# Altium PCB CH32L&VxxCx_Touch_Kit.PcbDoc
Units mil, origin at the board's own origin, x right, y up, seen from the top; angles counter-clockwise.
Board outline 2598.43 x 2007.87 mil, 2 copper layers (Top Layer, Bottom Layer); 52 components, 64 nets, 220 pads, 263 vias.
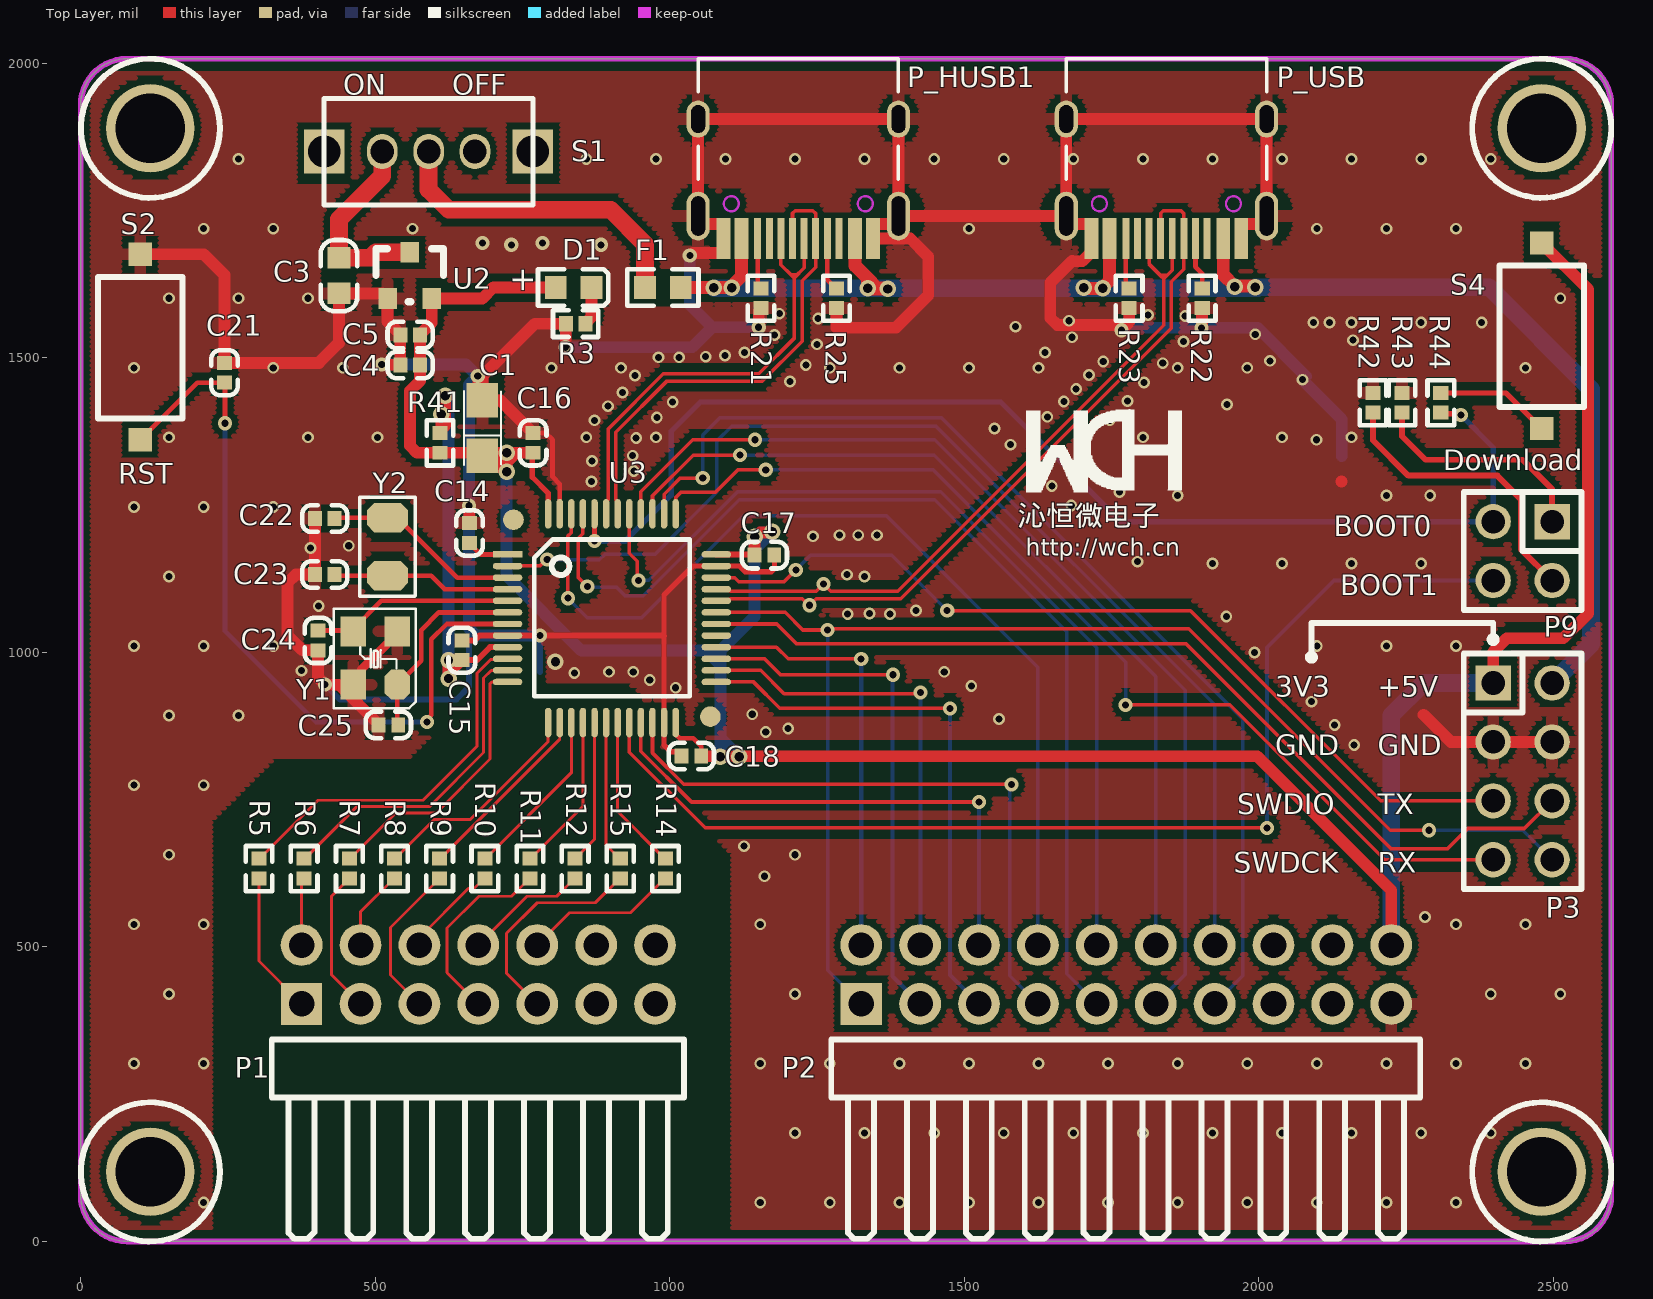
[diagram p0: Top Layer view]
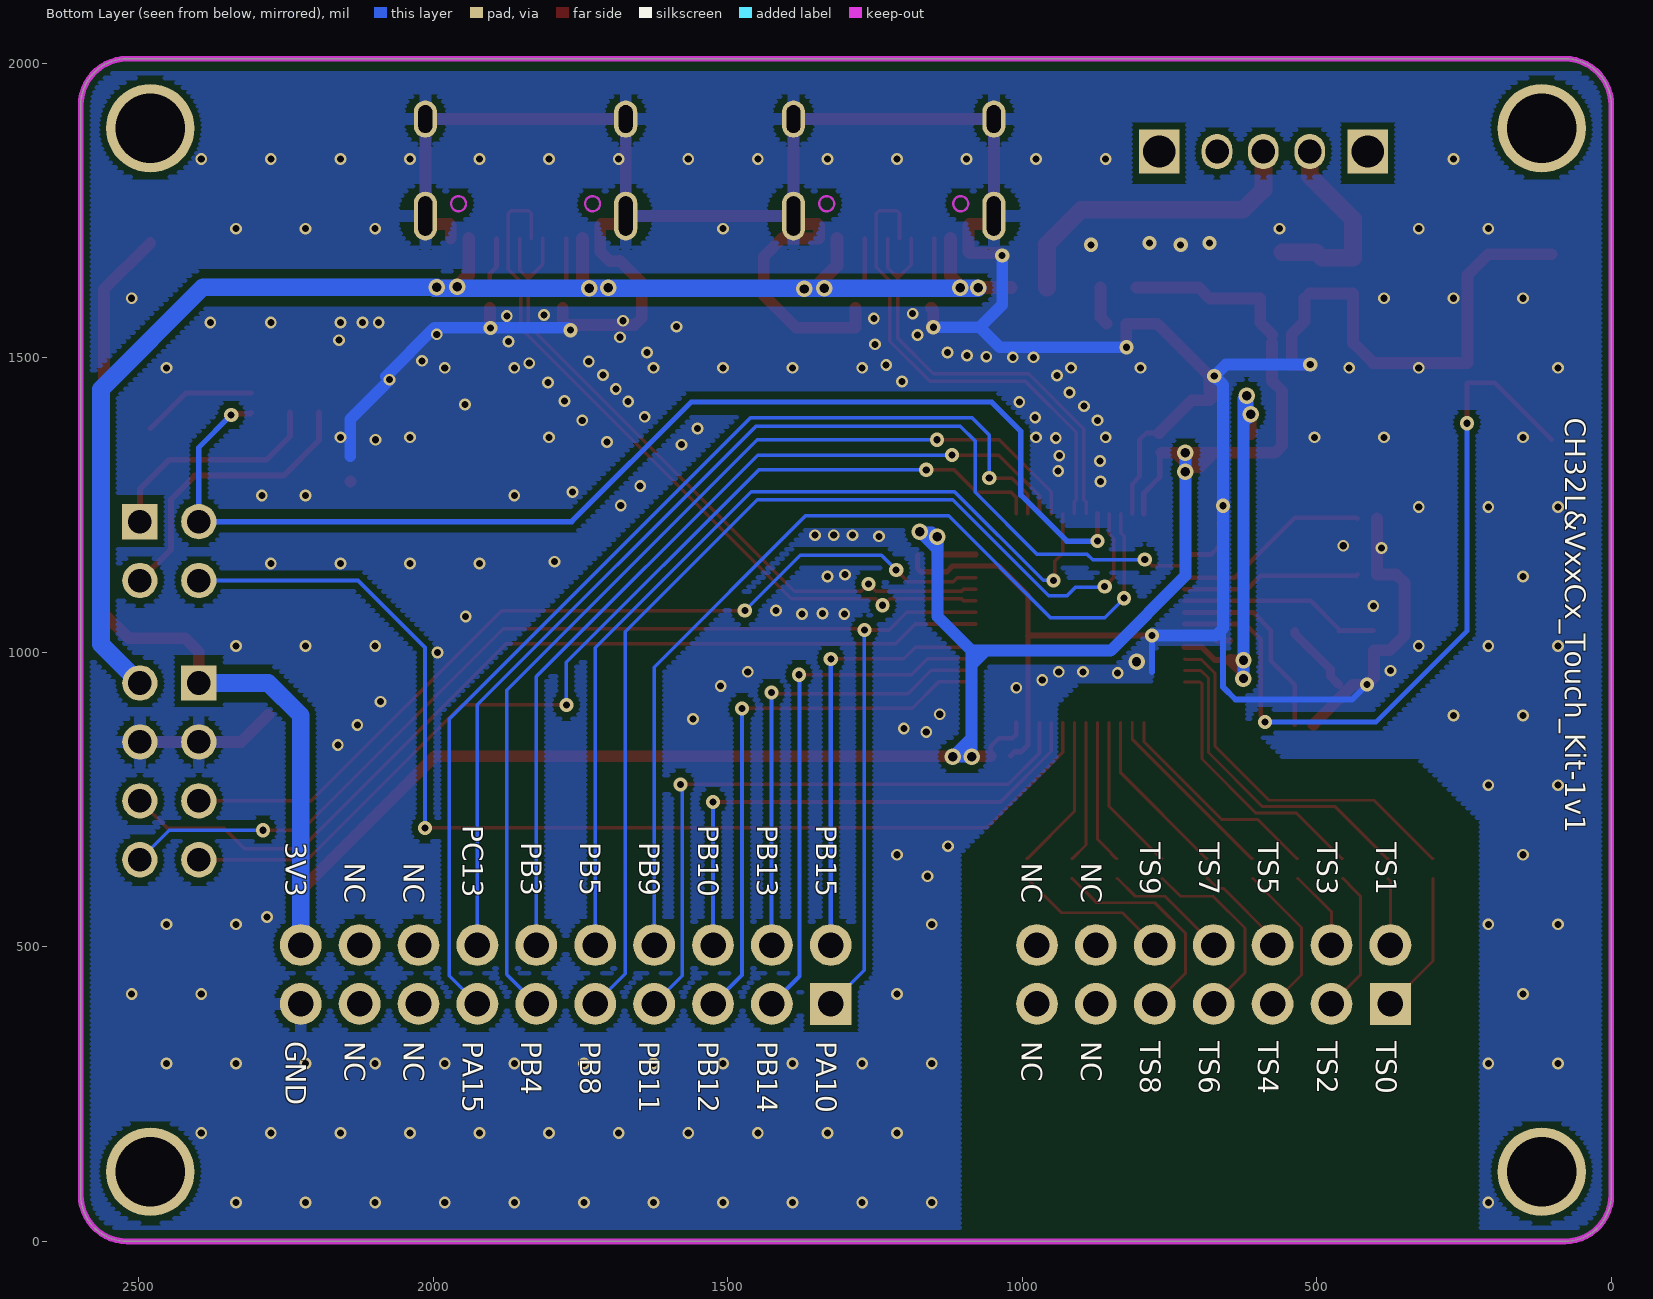
[diagram p1: Bottom Layer view, seen from below]

## Layer stack, top to bottom
Top Solder: solder mask 0.4, Solder Resist, Dk 3.5
Top Layer: signal copper 1.4
Dielectric 1: dielectric 12.6, FR-4, Dk 4.8
Bottom Layer: signal copper 1.4
Bottom Solder: solder mask 0.4, Solder Resist, Dk 3.5

## Board outline
0,78.74 ccw(c78.74,78.74) 78.74,0 2519.69,0 ccw(c2519.69,78.74) 2598.43,78.74 2598.43,1929.13 ccw(c2519.69,1929.13) 2519.69,2007.87 78.74,2007.87 ccw(c78.74,1929.13) 0,1929.13

## Design rules (kind name [scope] priority, off if disabled: settings)
Clearance Clearance_2 [InNetClass('Net Class1') vs InPolygon] p1: gap=39.37 ignorepadtopadclearanceinfootprint=FALSE
Clearance Clearance_1 [InPolygon] p2: gap=10 ignorepadtopadclearanceinfootprint=FALSE
Clearance [All] p3: gap=6 ignorepadtopadclearanceinfootprint=FALSE except(8: Arc-Via Track-Via SMDPad-Via THPad-Via Via-Via Via-Fill Via-Poly Via-Region Via-Hole)
ComponentClearance [All] p1 off: gap=10 collisioncheckmode=3 verticalgap=10 showdistances=FALSE
DiffPairsRouting [All] p1: maxlimit=10 minlimit=7 mostfreqgap=8 toplayer_minwidth=6 toplayer_maxwidth=15 toplayer_prefwidth=8 bottomlayer_minwidth=6 bottomlayer_maxwidth=15 bottomlayer_prefwidth=8 maxuncoupledlength=500
MinimumSolderMaskSliver [All] p1 off: minsoldermaskwidth=10
PolygonConnect PolygonConnect_1 [IsVia] p1: connectstyle=Direct reliefconductorwidth=10 reliefentries=4 polygonreliefangle="90 Angle" airgapwidth=10
PolygonConnect [All] p2: connectstyle=Relief reliefconductorwidth=20 reliefentries=4 polygonreliefangle="90 Angle" airgapwidth=10
RoutingVias [All] p1: holewidth=16 width=28 viastyle="Through Hole" minholewidth=12 minwidth=20 maxholewidth=28 maxwidth=50
SilkToSilkClearance [All] p1 off: silktosilkclearance=10
SilkToSolderMaskClearance [IsPad] p1 off: minsilkscreentomaskgap=10 clearancetoexposedcopper=TRUE
SolderMaskExpansion [All] p1: expansion=2 istentingtop=FALSE
Width [All] p1: maxlimit=100 minlimit=5 preferedwidth=10
25 further rules are at their usual default settings.

## Classes and differential pairs
net class "Net Class1": PA0 PA1 PA2 PA3 PA4 PA5 PA6 PA7 PB0 PB1 TS0 TS1 TS2 TS3 TS4 TS5 TS6 TS7 TS8 TS9
component class CH32VxxCx_Touch_Kit-1v1: C1 C3 C4 C5 C14 C15 C16 C17 C18 C21 C22 C23 C24 C25 D1 F1 P1 P2 P3 P9 P_HUSB1 P_USB R3 R5 R6 R7 R8 R9 R10 R11 R12 R14 R15 R21 R22 R23 R25 R41 R42 R43 R44 S1 S2 S4 U2 U3 Y1 Y2
differential pair PA11PA12: +PA12 -PA11
differential pair PB6PB7: +PB7 -PB6

## Components (designator, comment, footprint, x,y, rotation, side; value= is the part's Value field where it differs from the comment)
C1 "10uF" CASE-A_3216 682,1381 r90 top
C3 "10uF" 0603_C 438.36,1670.08 r270 top
C4 "2.2uF" 0402_C 576,1488 r270 top
C5 "0.1uF" 0402_C 576,1539 r270 top
C14 "0.1uF" 0402_C 660,1186 r180 top
C15 "0.1uF" 0402_C 647,987 r180 top
C16 "0.1uF" 0402_C 768,1372.46 r0 top
C17 "0.1uF" 0402_C 1177.46,1165 r270 top
C18 "0.1uF" 0402_C 1020,824 r90 top
C21 "0.1uF" 0402_C 244,1491.46 r0 top
C22 "12pF" 0402_C 431,1227.22 r270 top
C23 "12pF" 0402_C 431,1132.22 r270 top
C24 "22pF" 0402_C 403,1003.54 r180 top
C25 "22pF" 0402_C 505.54,877 r90 top
D1 "power" 0603+ 806.48,1619.59 r0 top
F1 "500mA" 0603 1018.63,1619.59 r180 top
P1 "Header 7X2" HDR-TH_14P-P2.54-H-M-R2-C10-S2.54 375,403.22 r0 top
P2 "Header 10X2" HDR-TH_20P-P2.54-H-M-R2-C10-S2.54 1775,453.22 r0 top
P3 "Header 4X2" IDC8-2.54mm 2398,948 r0 top
P9 "Header 2X2" IDC4-2.54mm 2498,1222 r270 top
P_HUSB1 "TYPE-C" TYPE-C-Receptacle-2.0 1218.24,1702.67 r180 top
P_USB "TYPE-C" TYPE-C-Receptacle-2.0 1843.24,1702.67 r180 top
R3 "1K" 0402 857,1558 r180 top
R5 "0Ω(560Ω)" 0402 302.64,649.76 r270 top
R6 "0Ω(560Ω)" 0402 379.3,616.3 r90 top
R7 "0Ω(560Ω)" 0402 455.97,649.76 r270 top
R8 "0Ω(560Ω)" 0402 532.64,616.3 r90 top
R9 "0Ω(560Ω)" 0402 609.3,649.76 r270 top
R10 "0Ω(560Ω)" 0402 685.97,616.3 r90 top
R11 "0Ω(560Ω)" 0402 762.64,649.76 r270 top
R12 "0Ω(560Ω)" 0402 839.3,616.3 r90 top
R14 "0Ω(560Ω)" 0402 992.64,616.3 r90 top
R15 "0Ω(560Ω)" 0402 915.97,649.76 r270 top
R21 "5.1K" 0402 1155,1618 r270 top
R22 "NC(5.1K)" 0402 1904,1618 r270 top
R23 "NC(5.1K)" 0402 1780,1618 r270 top
R25 "5.1K" 0402 1283,1618 r270 top
R41 "0Ω" 0402 610,1339 r90 top
R42 "10K" 0402 2193.86,1407 r90 top
R43 "10K" 0402 2243,1407 r90 top
R44 "1K" 0402 2309,1407 r90 top
S1 "SW SPDT" SW1 590.55,1850.39 r0 top
S2 "RST" SMD_6.1x3.65x2.5mm-KEY 101,1675.96 r270 top
S4 "Download" SMD_6.1x3.65x2.5mm-KEY 2480.32,1694.96 r270 top
U2 "6219P33M" SOT-23 558.36,1640.08 r0 top
U3 "CH32V203CxT" LQFP48 724.62,1166.32 r270 top
Y1 "8M" XT3225 537.36,945.22 r90 top
Y2 "32.768k" FC-135 521,1228.65 r270 top
? "Comment" HOLE 118.11,1889.76 r0 top
? "Comment" HOLE 2480.32,1889.76 r0 top
? "Comment" HOLE 2480.31,118.11 r0 top
? "Comment" HOLE 118.11,118.11 r0 top

## Footprints (in the part's own frame and the unit in brackets; to place one, negate y for a bottom-side part, rotate by r counter-clockwise, add the part's x,y. Pads: shape width x height; smd on the part's side, far side on the other; paste and mask are expansions set on the pad)
0402 [mm]
  rect 0.6x0.65 smd mask+0.051: 1(0,0) 2(0.85,0)
  silkscreen extent -0.55,-0.58 1.4,0.57
0402_C [mm]
  rect 0.65x0.6 smd mask+0.051: 1(0,0) 2(0,-0.85)
  silkscreen extent -0.58,-1.4 0.57,0.55
0603 [mm]
  rect 0.93x0.98 smd: 1(0,0) 2(1.54,0)
  silkscreen extent -0.76,-0.79 2.3,0.79
0603+ [mm]
  rect 0.93x0.98 smd: 1(0,0) 2(1.54,0)
  silkscreen extent -0.76,-0.79 2.27,0.79
0603_C [mm]
  rect 0.93x0.98 smd mask+0.051: 1(0,0) 2(1.54,0)
  silkscreen extent -0.76,-0.79 2.31,0.79
CASE-A_3216 [mil]
  rect 59.05x53.5 smd: 1(-47.24,0) 2(47.24,0)
  silkscreen extent -63,-32 63,32
FC-135 [mil]
  oct 50x70 smd: 1(0,0) 2(98.43,0)
  silkscreen extent -35,-47 133,47
HDR-TH_14P-P2.54-H-M-R2-C10-S2.54 [mm]
  rect 1.778x1.8 hole 1.1: 1(0,0)
  round 1.8 hole 1.1: 2(0,2.54) 3(2.54,0) 4(2.54,2.54) 5(5.08,0) 6(5.08,2.54) 7(7.62,0) 8(7.62,2.54) 9(10.16,0) 10(10.16,2.54) 11(12.7,0) 12(12.7,2.54) 13(15.24,0) 14(15.24,2.54)
  silkscreen extent -1.29,-10.13 16.49,-1.54
HDR-TH_20P-P2.54-H-M-R2-C10-S2.54 [mm]
  rect 1.778x1.8 hole 1.1: 1(-11.43,-1.27)
  round 1.8 hole 1.1: 2(-11.43,1.27) 3(-8.89,-1.27) 4(-8.89,1.27) 5(-6.35,-1.27) 6(-6.35,1.27) 7(-3.81,-1.27) 8(-3.81,1.27) 9(-1.27,-1.27) 10(-1.27,1.27) 11(1.27,-1.27) 12(1.27,1.27) 13(3.81,-1.27) 14(3.81,1.27) 15(6.35,-1.27) 16(6.35,1.27) 17(8.89,-1.27) 18(8.89,1.27) 19(11.43,-1.27) 20(11.43,1.27)
  silkscreen extent -12.72,-11.4 12.68,-2.81
HOLE [mm]
  round 3.81 hole 3: 0(0,0)
  silkscreen extent -3,-3 3,3
IDC4-2.54mm [mil]
  rect 60x60 hole 40: 1(0,0)
  round 60 hole 40: 2(100,0) 3(0,-100) 4(100,-100)
  silkscreen extent -50,-150 150,50
IDC8-2.54mm [mil]
  rect 60x60 hole 40: 1(0,0)
  round 60 hole 40: 2(100,0) 3(0,-100) 4(100,-100) 5(0,-200) 6(100,-200) 7(0,-300) 8(100,-300)
  silkscreen extent -50,-350 150,50
LQFP48 [mm]
  round 0.889 smd: 0(-1.496,0.254) 0(6.996,8.746)
  rect 0.28x1.27 smd mask+0.051: 1(0,0)
  oval 0.28x1.27 smd mask+0.051: 2(0.5,0) 3(1,0) 4(1.5,0) 5(2,0) 6(2.5,0) 7(3,0) 8(3.5,0) 9(4,0) 10(4.5,0) 11(5,0) 12(5.5,0) 25(5.5,9) 26(5,9) 27(4.5,9) 28(4,9) 29(3.5,9) 30(3,9) 31(2.5,9) 32(2,9) 33(1.5,9) 34(1,9) 35(0.5,9) 36(0,9)
  oval 1.27x0.28 smd mask+0.051: 13(7.25,1.75) 14(7.25,2.25) 15(7.25,2.75) 16(7.25,3.25) 17(7.25,3.75) 18(7.25,4.25) 19(7.25,4.75) 20(7.25,5.25) 21(7.25,5.75) 22(7.25,6.25) 23(7.25,6.75) 24(7.25,7.25) 37(-1.75,7.25) 38(-1.75,6.75) 39(-1.75,6.25) 40(-1.75,5.75) 41(-1.75,5.25) 42(-1.75,4.75) 43(-1.75,4.25) 44(-1.75,3.75) 45(-1.75,3.25) 46(-1.75,2.75) 47(-1.75,2.25) 48(-1.75,1.75)
  silkscreen extent -0.65,1.15 6.11,7.86
SMD_6.1x3.65x2.5mm-KEY [mm]
  rect 1x1 smd: 1(0,0) 2(8,0)
  silkscreen extent 0.98,-1.83 7.08,1.83
SOT-23 [mm]
  rect 0.8x0.9 smd: 1(-0.95,-1) 2(0.95,-1) 3(0,1)
  silkscreen extent -1.46,-1.14 1.46,1.15
SW1 [mm]
  rect 1.75x1.9 hole 1.4: 0(-4.5,0) 0(4.5,0)
  oval 1.321x1.524 hole 1.016: 1(0,0) 2(-2,0) 3(2,0)
  silkscreen extent -4.51,-2.31 4.5,2.29
TYPE-C-Receptacle-2.0 [mm]
  oval 1x2.1 hole 0.6 slot 1.7 at 90 deg: 0(-4.32,-0.97) 0(4.32,-0.97)
  oval 1x1.6 hole 0.6 slot 1.2 at 90 deg: 0(-4.32,-5.15) 0(4.32,-5.15)
  rect 0.6x1.75 smd mask+0.051: A1(-3.225,0) A4(-2.45,0) B1(3.225,0) B4(2.45,0)
  rect 0.3x1.75 smd mask+0.051: A5(-1.25,0) A6(-0.25,0) A7(0.25,0) A8(1.25,0) B5(1.75,0) B6(0.75,0) B7(-0.75,0) B8(-1.75,0)
  Keep-Out Layer circle w0.1: c2.89,-1.5 r0.325
  Keep-Out Layer circle w0.1: c-2.89,-1.5 r0.325
  silkscreen extent -4.32,-7.75 4.32,-2.55
XT3225 [mm]
  oct 1.3x1.1 smd: 1(0,0)
  rect 1.3x1.1 smd: 2(2.3,0) 3(2.3,1.9) 4(0,1.9)
  silkscreen extent -1.02,-0.8 3.27,2.74

## Part data
C1: library part T-A/4.7uF/16V
C3 C4 C5 C21: library part CAP, "Capacitor"
C14 C15 C16 C17 C18 C22 C23 C24 C25: library part Cap, "Capacitor", LatestRevisionDate=17-Jul-2002, LatestRevisionNote="Re-released for DXP Platform.", PackageReference=RAD-0.3, Published=8-Jun-2000, Publisher="Altium Limited"
D1: library part LED0, "Typical INFRARED GaAs LED", LatestRevisionDate=08-Jul-2005, LatestRevisionNote="Mech Layer 1 removed.", PackageDescription="LED; 2 Leads", PackageReference=LED-0, Published=8-Jun-2000, Publisher="Altium Limited"
F1: library part FUSE1, "Fuse"
P1: "Header, 7-Pin, Dual row", LatestRevisionDate=17-Jul-2002, LatestRevisionNote="Re-released for DXP Platform.", Publisher="Altium Limited"
P2: "Header, 10-Pin, Dual row", LatestRevisionDate=17-Jul-2002, LatestRevisionNote="Re-released for DXP Platform.", Publisher="Altium Limited"
P3: "Header, 4-Pin, Dual row", LatestRevisionDate=17-Jul-2002, LatestRevisionNote="Re-released for DXP Platform.", Publisher="Altium Limited"
P9: "Header, 2-Pin, Dual row", LatestRevisionDate=17-Jul-2002, LatestRevisionNote="Re-released for DXP Platform.", Publisher="Altium Limited"
P_HUSB1 P_USB: library part TYPE-C1
R3 R5 R6 R7 R8 R9 R10 R11 R12 R14 R15: library part RES
R21 R22 R23 R25 R41 R42 R43 R44: library part Res2, "Resistor"
  R41 R42 R43 R44: LatestRevisionDate=17-Jul-2002, LatestRevisionNote="Re-released for DXP Platform.", PackageReference=AXIAL-0.4, Published=8-Jun-2000, Publisher="Altium Limited"
S2: library part SW-PB, "Switch", LatestRevisionDate=17-Jul-2002, LatestRevisionNote="Re-released for DXP Platform.", PackageDescription="Switch; 2 Leads", PackageReference=SPST-2, Published=24-Mar-1999, Publisher="Altium Limited"
S4: library part KEY1
U3: "RISC-V LMD-MCU, 144MHz, 2*USB FS, CAN"
Y1 Y2: library part XTAL, "Crystal Oscillator", LatestRevisionDate=17-Jul-2002, LatestRevisionNote="Re-released for DXP Platform.", PackageReference=R38, Published=8-Jun-2000, Publisher="Altium Limited"

## Via types
v1: diameter 20, hole 12, Top Layer to Bottom Layer, tented both sides, 204 vias
v2: diameter 24, hole 12, Top Layer to Bottom Layer, tented both sides, 40 vias
v3: diameter 28, hole 16, Top Layer to Bottom Layer, tented both sides, 19 vias

## Nets (pads, with @x,y where several pads share a name; then routed paths per layer and width w, separated by ;. In a path a pad name is that pad's centre, name@x,y a point inside that pad or via, vN(x,y) a via of type N, cw(c..) or ccw(c..) an arc to the next point about the centre after c; other vN are vias at no path point)
3V3: C1.1 C4.1 C5.1 C16.2 C17.2 C18.2 D1.1 P2.20 P3.1 R41.1 S4.1 U2.2 U3.24 U3.36 U3.48 | length 5212
  Top Layer w8: U3.24 1010.06,860.58 1016.64,854 1040,854 1053.46,840.54 C18.2 ; C17.2@1142.68,1166.32 C17.2
  Top Layer w9: C16.2@764.02,1339 766.69,1339 766.69,1297.31 793.52,1270.48 U3.48
  Top Layer w10: U3.36 C17.2@1142.68,1166.32
  Top Layer w20: 576,1526 C4.1 576,1461 559,1444 559,1350.72 570.72,1339 R41.1 v3(723.01,1339) ; C5.1 576,1539.98 595.76,1559.75 U2.2 681.71,1600.71 700.59,1619.59 D1.1 ; C1.1 682,1330.98 C1.1@689.98,1323 ; C16.2@764.02,1339 739.01,1339 ; C18.2 1053.96,823.5 1086,823.5 1118,823.5 1997.5,823.5 2225,596 P2.20 ; C17.2 v3(1144,1196) 1146.16,1196 1153.63,1203.47 1172.47,1203.47 v3(1174,1205) ; P3.1 2398,1001 2421,1024 2517,1024 2559,1066 2559,1616.28 S4.1 ; C1.1@689.98,1323 723.01,1323 ; C1.1@689.98,1323 698.75,1314.23 713.61,1314.23 720.84,1307 v3(723.01,1307) 723.01,1323 ; 723.01,1323 739.01,1339 ; 723.01,1323 v3(723.01,1339) ; v3(723.01,1339) 739.01,1339
  Bottom Layer w20: v3(723.01,1339) v3(723.01,1307) 723.01,1129.99 850,1003 1062,1003 ; v3(1174,1205) v3@1172.47,1203.47 ; 1062,1003 1086,1003 ; 1062,1003 1086,979 ; 1086,855 v3(1118,823) v3(1086,823) 1086,855 ; 1086,855 1086,979 ; 1086,979 1086,1003 ; 1086,1003 1144,1061 1144,1175 ; 1144,1175 v3@1172.47,1203.47 ; 1144,1175 v3(1144,1196) 1146.16,1196 1153.63,1203.47 v3@1172.47,1203.47
  Bottom Layer w30: P2.20 2225,893 2280,948 P3.1
+5V: F1.1 P3.2 P_HUSB1.A4 P_HUSB1.B4 P_USB.A4 P_USB.B4 | length 2672.2
  Top Layer w22: F1.1 v3@1102.1,1619.59 ; v3@1102.59,1619.59 1121.78,1638.78 P_HUSB1.B4 ; P_HUSB1.A4 1314.69,1656.31 1336,1635 ; v3@1336,1617 v3(1370,1617) ; v3(1336,1618) 1336,1635 ; v3@1366,1619 1352,1619 1336,1635 ; v3@1701,1618 v3(1735,1618) 1735,1619.62 1746.78,1631.4 P_USB.B4 ; P_USB.A4 1939.69,1640.95 v3@1958.65,1622 ; v3(1959,1621) 1959,1621.65 v3@1958.65,1622 ; v3@1989,1622 v3@1958.65,1622
  Bottom Layer w30: v3@1076,1618 v3(1336,1618) v3(1735,1618) 1959,1618 v3@1998,1618 ; v3(1994,1620) 2391,1620 2564,1447 2564,1014 P3.2
  other v3: 1075,1619 1105.1,1619 1702.66,1618.82
BOOT0: P9.3 R44.1 U3.44 | length 2057.4
  Top Layer w9: v2(871.93,1188.87) 872.09,1189.04 872.09,1235.06 U3.44 ; R44.1 2311,1405 2341,1405 v2(2343,1403)
  Bottom Layer w9: v2(871.93,1188.87) 924.33,1188.87 1002.36,1266.89 1002.36,1375.36 1052,1425 1562,1425 1765,1222 P9.3 2398,1348 v2(2343,1403)
BOOT1: P9.4 U3.20 | length 1923.4
  Top Layer w6: U3.20 931.32,830.68 1060,702 v2(2014,702)
  Bottom Layer w7: v2(2014,702) 2014,1008 2128,1122 P9.4
GND: C1.2 C3.2 C4.2 C5.2 C14.2 C15.2 C16.1 C17.1 C18.1 C21.1 C22.2 C23.2 C24.1 C25.1 P2.19 P3.3 P3.4 P_HUSB1.0 P_HUSB1.A1 P_HUSB1.B1 P_USB.0 P_USB.A1 P_USB.B1 R3.2 R21.2 R22.2 R23.2 R25.2 R42.2 R43.2 S2.1 U2.1 U3.8 U3.23 U3.35 U3.47 Y1.2 Y1.4 | length 8093.5
  Top Layer w8: C16.1 789.54,1372.46 801,1361 801,1298 813.21,1285.79 U3.47
  Top Layer w9: C18.1 1012.89,831.11 1001.89,831.11 990.37,842.63 U3.23 990.37,1028 990.37,1097.37 1039.64,1146.64 U3.35 1118.36,1146.64 1128,1137 1172.59,1137 1177.96,1142.36 1177.96,1164.51 C17.1
  Top Layer w10: C15.2 669.15,1020.46 677.21,1028.53 U3.8 v2(780,1028.53) 989.84,1028.53 990.37,1028
  Top Layer w15: Y1.4 476.71,959.37 476.71,971.19 537.36,1031.83 Y1.2
  Top Layer w20: S2.1 208.96,1675.96 244,1640.92 C21.1 404.46,1491.46 438.36,1525.36 C3.2 U2.1@512.22,1609.45 ; C22.2 C23.2 365.22,1132.22 351,1118 351,1029 376.46,1003.54 C24.1 403,956.94 v2(414.72,945.22) 438.64,945.22 438.64,944.88 505.54,877.98 C25.1 ; v2(511,1489) 511.5,1488.5 542.04,1488.5 C4.2 C5.2 542.54,1539.98 520.96,1561.56 U2.1 ; v2(659,1249) 659.5,1248.5 659.5,1219.96 C14.2 ; v2(674,1469) 674.77,1468.23 C1.2@674.77,1435.47 ; C16.1 767.02,1372.46 765.2,1374.28 765.2,1375.26 712.22,1428.24 C1.2 C1.2@674.77,1435.47 ; v2(823,1518) 823.27,1518.27 823.27,1557.73 R3.2 771,1558 682,1469 682,1442.71 C1.2@674.77,1435.47 ; v2(1034,1674) 1035.08,1674 1039.3,1678.22 1089.46,1678.22 1091.27,1680.03 P_HUSB1.B1 1091.27,1725.31 1089.46,1727.12 1057.11,1727.12 1048.16,1736.07 1048.16,1740.86 1048.16,1905.43 1388.32,1905.43 P_HUSB1.0@1388.32,1740.86 ; v2(1151,1552) 1151,1580.54 1152.2,1581.74 1152.2,1582.72 1154.02,1584.54 R21.2 ; R25.2 1283,1551 1384,1551 1439,1606 1439,1672 1408.33,1702.67 P_HUSB1.A1 1345.2,1725.31 1347.02,1727.12 1379.37,1727.12 1388.32,1736.07 P_HUSB1.0@1388.32,1740.86 ; R23.2 1780,1560.56 1775.44,1556 1657.72,1556 1646,1567.72 1646,1627.43 1683.28,1664.72 1683.83,1664.17 1700.4,1664.17 1716.27,1680.03 P_USB.B1 1716.27,1725.31 1714.46,1727.12 1682.11,1727.12 1673.16,1736.07 P_USB.0@1673.16,1740.86 ; v2(1903,1551) 1903.5,1551.5 1903.5,1584.04 R22.2 ; P_USB.A1 1970.2,1725.31 1972.02,1727.12 2004.37,1727.12 2013.32,1736.07 2013.32,1740.86 2013.32,1905.43 1673.16,1905.43 P_USB.0@1673.16,1740.86 ; 2140.35,1290 2140.67,1290.33 ; 2279.76,894.24 2326,848 P3.3 P3.4 ; P_HUSB1.0@1388.32,1740.86 P_USB.0@1673.16,1740.86
  Bottom Layer w10: v2(414.72,945.22) 439.94,920 638,920 659,941 659,1041 ; 780,967 v2(780,1028.53)
  Bottom Layer w20: v2(511,1489) 654,1489 v2(674,1469) 659,1454 v2(659,1249) 659,1041 671.47,1028.53 v2(780,1028.53) ; v2(823,1518) 1038,1518 1072,1552 ; v2(1034,1674) 1034,1590 1072,1552 ; v2(1151,1552) 1072,1552 ; v2(1767,1547) 1771,1551 v2(1903,1551) 1998,1551 v1@2080,1469 ; v1(2074,1463) 2141,1396 2141,1333
  other v1: 208.74,65.87 1153.62,65.87 1271.73,65.87 1389.84,65.87 1507.95,65.87 1626.06,65.87 1744.17,65.87 1862.28,65.87 1980.39,65.87 2098.5,65.87 2216.61,65.87 2334.72,65.87 1212.68,183.98 1330.79,183.98 1448.9,183.98 1567.01,183.98 1685.12,183.98 1803.23,183.98 1921.34,183.98 2039.45,183.98 2157.56,183.98 2275.67,183.98 2393.78,183.98 90.63,302.09 208.74,302.09 1153.62,302.09 1271.73,302.09 1389.84,302.09 1507.95,302.09 1626.06,302.09 1744.17,302.09 1862.28,302.09 1980.39,302.09 2098.5,302.09 2216.61,302.09 2334.72,302.09 2452.83,302.09 149.68,420.2 1212.68,420.2 2393.78,420.2 2511.89,420.2 90.63,538.31 208.74,538.31 1153.62,538.31 2334.72,538.31 2452.83,538.31 2282,551 1161,620 149.68,656.42 1212.68,656.42 1126,671 90.63,774.53 208.74,774.53 2162,843 1163,865 1201,871 2128.85,876.85 1559,887 149.68,892.64 267.79,892.64 1140,895 2089.35,916.35 1010,940 1512,943 966,953 838,965 897,967 938,967 1466,967 375,969 1992.5,999.85 90.63,1010.75 208.74,1010.75 326.85,1010.75 2098.5,1010.75 2216.61,1010.75 2334.72,1010.75 1944.85,1060.85 1302,1065 1374,1065 1339,1066 1418,1071 404,1079 149.68,1128.86 1330.79,1128.86 1301,1132 1921.34,1151 2039.45,1151 2157.56,1151 2275.67,1151 1794,1154 390,1177 455,1181 1243,1197 1288,1199 1320,1199 1352,1199 90.63,1246.97 208.74,1246.97 326.85,1246.97 1681.59,1249.59 1862.28,1266.5 2216.61,1266.5 2291,1266.5 1763.67,1272.15 1648.59,1282.59 867,1290 939,1308 868,1325 937,1334 1578.59,1352.59 1705,1357 2098,1361 943,1364 149.68,1365.08 385.9,1365.08 504.01,1365.08 858.34,1365.08 976.45,1365.08 1803.23,1365.08 2039.45,1365.08 2157.56,1365.08 1551.09,1380.09 872,1394 1747,1394 978,1399 1641,1400 895,1418 1946,1421 1005,1425 1669,1426 1777,1427 920,1441 1690,1447 1805,1458 1204,1460 941,1470 1712,1471 90.63,1483.19 326.85,1483.19 444.96,1483.19 799.29,1483.19 917.4,1483.19 1271.73,1483.19 1389.84,1483.19 1507.95,1483.19 1626.06,1483.19 1862.28,1483.19 1980.39,1483.19 2452.83,1483.19 1231,1488 1837,1491 1736,1494 2019,1495 981,1501 1016,1501 1061,1502 1094,1504 1127,1509 1637,1509 1250,1523 1872,1528 2160,1530 1683,1535 1178,1539 1994,1540 1587,1553 2092.56,1560 2120,1560 2157.56,1560 2275.67,1560 2378.41,1560 1678,1563 1252,1567 1875,1571 1812,1573 1186,1575 149.68,1601.3 267.79,1601.3 385.9,1601.3 2511.89,1601.3 208.74,1719.41 326.85,1719.41 563.07,1719.41 1507.95,1719.41 2098.5,1719.41 2216.61,1719.41 2334.72,1719.41 267.79,1837.52 858.34,1837.52 976.45,1837.52 1094.57,1837.52 1212.68,1837.52 1330.79,1837.52 1448.9,1837.52 1567.01,1837.52 1685.12,1837.52 1803.23,1837.52 1921.34,1837.52 2039.45,1837.52 2157.56,1837.52 2275.67,1837.52 2393.78,1837.52
  other v2: 731,1692 883,1692 682,1695 784,1695
  other v3: 806,984
NetD1_2: D1.2 R3.1 | length 65.8
  Top Layer w20: R3.1 857,1558.98 867.11,1569.09 D1.2
NetF1_2: F1.2 S1.1 | length 544.1
  Top Layer w30: S1.1 590.55,1785.45 624.63,1751.37 899.63,1751.37 958,1693 F1.2
NetP9_1: P9.1 R43.1 | length 387.3
  Top Layer w10: R43.1 2243,1367 2283,1327 2448,1327 2498,1277 P9.1
NetP9_2: P9.2 R42.1 | length 499.4
  Top Layer w10: R42.1 2193.86,1360.14 2254,1300 2405,1300 2445,1260 2445,1175 P9.2
NetP_HUSB1_A5: P_HUSB1.A5 R25.1 | length 91.7
  Top Layer w8: P_HUSB1.A5 1267.45,1632.57 1282.02,1618 R25.1
NetP_HUSB1_B5: P_HUSB1.B5 R21.1 | length 85.4
  Top Layer w8: P_HUSB1.B5 1149.34,1619.66 R21.1@1151,1618
NetP_USB_A5: P_USB.A5 R22.1 | length 89.5
  Top Layer w8: P_USB.A5 1892.45,1654.79 1904,1643.24 R22.1
NetP_USB_B5: P_USB.B5 R23.1 | length 85.6
  Top Layer w8: R23.1@1772,1618 1774.34,1620.34 P_USB.B5
NetR44_2: R44.2 S4.2 | length 196.4
  Top Layer w9: R44.2 2419.85,1440.46 S4.2
NRST: C21.2 S2.2 U3.7 | length 1295.8
  Top Layer w8: S2.2 198,1458 C21.2 245,1457 v2(245,1389) ; v2(588,882) 588,886.33 595,893.33 595,1022 621.21,1048.21 U3.7
  Bottom Layer w8: v2(245,1389) 245,1036 399,882 v2(588,882)
PA0: R5.1 U3.10 | length 635.2
  Top Layer w5: R5.1 303.62,649.76 402.86,749 581,749 673,841 673,965 696.01,988.01 723.47,988.01 U3.10
PA1: R6.2 U3.11 | length 551.8
  Top Layer w5: R6.2 380.29,649.76 468.52,738 592,738 684,830 684,956.44 697.03,969.47 U3.11
PA2: R7.1 U3.12 | length 467.8
  Top Layer w5: R7.1 456.96,649.76 534.19,727 603,727 695,819 695,946.86 697.93,949.79 U3.12
PA3: R8.2 U3.13 | length 375.6
  Top Layer w5: R8.2 533.62,649.76 599.86,716 660.97,716 793.52,848.55 U3.13
PA4: R9.1 U3.14 | length 316.2
  Top Layer w5: R9.1 610.29,649.76 813.21,852.68 U3.14
PA5: R10.2 U3.15 | length 292.6
  Top Layer w5: R10.2 686.95,649.76 832.89,795.7 U3.15
PA6: R11.1 U3.16 | length 269
  Top Layer w5: R11.1 763.62,649.76 852.58,738.72 U3.16
PA7: R12.2 U3.17 | length 245.4
  Top Layer w5: R12.2 840.29,649.76 849.6,659.08 849.6,660.06 872.26,682.72 U3.17
PA8: U3.29
PA9: P3.6 U3.30 | length 1610.5
  Top Layer w6: U3.30 1181.79,1048.21 1215,1015 1876,1015 2224,667 2321,667 2355,701 2451,701 P3.6
PA10: P2.1 P3.8 U3.31 | length 2253
  Top Layer w6: U3.31 1196.1,1067.9 1226,1038 v2(1268,1038) 1270,1040 1881,1040 2223,698 v2(2289,698)
  Bottom Layer w6: v2(1268,1038) 1268,460.65 1325,403.65 P2.1 ; v2(2289,698) 2448,698 P3.8
PA11: P_USB.A7 P_USB.B7 U3.32 | length 1263.1
  Top Layer w6: U3.32 1099.8,1087.58 1103.14,1090.93 1225.02,1090.93 1235.94,1080 v2(1237,1080) 1238.06,1080 1248.98,1090.93 1392.31,1090.93 1851.67,1550.28 1851.67,1629.1 1872.76,1650.19 1872.76,1745.24 1868,1750 1838,1750 1833.39,1745.39 P_USB.A7
PA12: P_USB.A6 P_USB.B6 U3.33 | length 1199
  Top Layer w6: U3.33 1099.8,1107.27 1103.14,1103.93 1248.93,1103.93 v2(1261,1116) 1273.07,1103.93 1386.93,1103.93 1838.67,1555.67 1838.67,1634.48 ; P_USB.B6 1813.71,1659.44 1834.08,1639.08 ; 1843,1640 1835,1640 1834.08,1639.08 ; P_USB.A6 1853.08,1648.89 1838.67,1634.48 ; 1834.08,1639.08 1838.67,1634.48
PA13: P3.5 U3.34 | length 1513.3
  Top Layer w6: U3.34 1110.05,1126.95 1117,1120 1194,1120 v2(1214,1140) ; v2(1471,1071) 1884,1071 2207,748 P3.5
  Bottom Layer w6: v2(1214,1140) 1239,1165 1377,1165 v2(1471,1071)
PA14: P3.7 U3.37 | length 1751.6
  Top Layer w6: U3.37 1010.06,1263.06 1019,1272 1077.75,1272 1115.75,1310 v2(1163,1310) ; v2(1774,911) 1951,911 2214,648 P3.7
  Bottom Layer w6: v2(1163,1310) 1447,1310 1774,983 v2(1774,911)
PA15: P2.13 U3.38 | length 1827.5
  Top Layer w6: U3.38 990.37,1268.37 1018,1296 v2(1056,1296)
  Bottom Layer w6: v2(1056,1296) 1056,1368.97 1085.03,1398 1462,1398 1973,887 1973,451.22 P2.13
PB0: R15.1 U3.18 | length 241.7
  Top Layer w5: U3.18 891.95,672.81 914.99,649.76 R15.1
PB1: R14.2 U3.19 | length 265.3
  Top Layer w5: U3.19 911.63,729.79 991.65,649.76 R14.2
PB3: P2.12 U3.39 | length 1525
  Top Layer w6: U3.39 970.69,1265.66 1040.03,1335 v2(1119,1335)
  Bottom Layer w6: v2(1119,1335) 1449,1335 1825,959 P2.12
PB4: P2.11 U3.40 | length 1727.8
  Top Layer w6: U3.40 951,1273.03 1038.97,1361 v2(1145,1361)
  Bottom Layer w6: v2(1145,1361) 1450,1361 1875,936 1875,453.22 P2.11
PB5: P2.10 U3.41 | length 1574.7
  Top Layer w6: U3.41 931.32,1168.51 945,1154.83 945,1123.89 v2(946.66,1122.23)
  Bottom Layer w6: v2(946.66,1122.23) 964.32,1122.23 1115.09,1273 1460,1273 1725,1008 P2.10
PB6: P_HUSB1.A7 P_HUSB1.B7 U3.42 | length 833.2
  Top Layer w6: U3.42@911.82,1235.04 U3.42 911.63,1256.07 908.29,1259.41 908.29,1373.9 994.38,1460 1156.38,1460 1224.74,1528.35 1224.74,1631.03 1247.76,1654.06 P_HUSB1.B7 1247.76,1745.24 1243,1750 1213,1750 1208.39,1745.39 P_HUSB1.A7
PB7: P_HUSB1.A6 P_HUSB1.B6 U3.43 | length 789.2
  Top Layer w6: U3.43@891.47,1235.22 891.47,1255.6 895.29,1259.41 895.29,1379.29 989,1473 1151,1473 1211.74,1533.74 1211.74,1635 ; 1188.71,1658 P_HUSB1.B6 ; 1188.74,1658 1205.87,1640.87 ; 1216,1641 1215.87,1640.87 1205.87,1640.87 ; P_HUSB1.A6 1228.08,1652.76 1211.74,1636.41 1211.74,1635 ; 1205.87,1640.87 1211.74,1635
PB8: P2.9 U3.45 | length 1766.5
  Top Layer w6: U3.45 852.58,1201.58 844.89,1193.89 844.89,1127.11 v2(860,1112)
  Bottom Layer w6: v2(860,1112) 861.78,1110.22 909.78,1110.22 924,1096 955.06,1096 1118.06,1259 1450,1259 1674,1035 1674,454.22 P2.9
PB9: P2.8 U3.46 | length 1607.2
  Top Layer w6: v2(827,1092) 827,1197.5 832.89,1203.39 U3.46
  Bottom Layer w6: v2(827,1092) 860,1059 952,1059 1125,1232 1368,1232 1625,975 P2.8
PB10: P2.6 U3.21 | length 901.3
  Top Layer w6: U3.21 951,831.97 1036.97,746 v2(1525,746)
  Bottom Layer w7: P2.6 v2(1525,746)
PB11: P2.7 U3.22 | length 1076.9
  Top Layer w6: U3.22 970.69,829.26 1023.94,776 v2(1580,776)
  Bottom Layer w6: v2(1580,776) 1577,773 1577,451.22 P2.7
PB12: P2.5 U3.25 | length 937.7
  Top Layer w6: U3.25 1142.21,949.79 1187,905 v2(1476,905)
  Bottom Layer w7: v2(1476,905) 1476,452.22 P2.5
PB13: P2.4 U3.26 | length 793.4
  Top Layer w6: U3.26 1154.53,969.47 1194,930 1424,930 v2(1426,932)
  Bottom Layer w7: P2.4 1425.5,503.72 1425.5,931.5 v2(1426,932)
PB14: P2.3 U3.27 | length 890
  Top Layer w6: U3.27 1160.84,989.16 1188,962 v2(1379,962)
  Bottom Layer w7: v2(1379,962) 1378,961 1378,450.22 P2.3
PB15: P2.2 U3.28 | length 740
  Top Layer w6: U3.28 1181.16,1008.84 1201,989 v2(1325,989)
  Bottom Layer w7: P2.2 v2(1325,989)
PC13: P2.14 U3.2 | length 1954.3
  Top Layer w6: U3.2 725.3,1147.32 779.77,1147.32 790.45,1158 v2(792,1158)
  Bottom Layer w6: v2(792,1158) 793,1157 880.51,1157 890.51,1167 975.15,1167 1080,1271.85 1080,1359 1105,1384 1452,1384 1925,911 P2.14
PC14: C22.1 U3.3 Y2.1 | length 336.3
  Top Layer w8: C22.1 432.43,1228.65 537.35,1228.65 639.05,1126.95 U3.3
PC15: C23.1 U3.4 Y2.2 | length 304
  Top Layer w8: C23.1 433,1130.22 Y2.2 594.78,1130.22 617.73,1107.27 U3.4
PD0: C24.2 U3.5 Y1.3 | length 342
  Top Layer w8: C24.2 461.33,1037 Y1.3 ; Y1.3@462.55,1039.71 510.43,1087.58 U3.5
PD1: C25.2 U3.6 Y1.1 | length 336.8
  Top Layer w8: C25.2@537.36,877 Y1.1 578,985.86 578,1038 607.9,1067.9 U3.6
TS0: P1.1 R5.2 | length 243.1
  Top Layer w5: R5.2 302.64,476.02 375,403.65 P1.1
TS1: P1.2 R6.1 | length 114.9
  Top Layer w5: P1.2 375,612 R6.1
TS2: P1.3 R7.2 | length 246.4
  Top Layer w5: R7.2 454.99,616.3 445.68,606.99 445.68,606 426,586.33 426,452.22 P1.3
TS3: P1.4 R8.1 | length 137.5
  Top Layer w5: P1.4 475,559.65 531.65,616.3 R8.1
TS4: P1.5 R9.2 | length 268.5
  Top Layer w5: P1.5 526,452.22 526,532.99 599.01,606 599.01,606.99 608.32,616.3 R9.2
TS5: P1.6 R10.1 | length 165.3
  Top Layer w5: P1.6 575,516 658,599 667.69,599 684.99,616.3 R10.1
TS6: P1.7 R11.2 | length 326.3
  Top Layer w5: P1.7 622,456.22 622,532 676,586 731.35,586 761.65,616.3 R11.2
TS7: P1.8 R12.1 | length 211.1
  Top Layer w5: P1.8 757.78,586 808.02,586 838.32,616.3 R12.1
TS8: P1.9 R15.2 | length 372.9
  Top Layer w5: P1.9 723,455.22 723,523 775,575 873.69,575 914.99,616.3 R15.2
TS9: P1.10 R14.1 | length 264.5
  Top Layer w5: P1.10 829.78,558 933.35,558 991.65,616.3 R14.1
V5V: C3.1 S1.2 U2.3 | length 334.6
  Top Layer w30: S1.2 511.81,1808.81 438.36,1735.36 C3.1 491.3,1670.08 500.67,1679.45 U2.3
VBAT: C14.1 U3.1 | length 73.8
  Top Layer w8: C14.1@660.11,1186 660.98,1186 668.8,1178.19 668.8,1176.33 678.8,1166.32 U3.1
VDDA: C15.1 R41.2 U3.9 | length 810.7
  Top Layer w10: C15.1 673,987 694.84,1008.84 U3.9
  Top Layer w20: R41.2 R41.2@611.46,1371 ; R41.2@610,1376 R41.2@612,1378 ; v3(612,1404) R41.2@612,1378 ; v3(619,1436) 619,1385 R41.2@612,1378 ; v3(624.4,955.62) v3(624.36,986.51) 624.61,986.75 C15.1@645.77,986.75 ; v3(624.4,955.62) 625.94,957.15 625.94,966.92 C15.1@645.77,986.75 ; C15.1@645.77,986.75 646.02,987 C15.1 646.75,986.75 C15.1@645.77,986.75
  Bottom Layer w20: v3(624.4,955.62) v3(624.4,955.62) v3(624.36,986.51) 624.36,1389.47 ; 624.36,1389.47 624.36,1430.64 v3(619,1436) 617.47,1434.47 617.47,1411.63 612,1406.16 v3(612,1404) 612,1401.84 624.36,1389.47
pads on no net: ?.0 P1.11 P1.12 P1.13 P1.14 P2.15 P2.16 P2.17 P2.18 P_HUSB1.A8 P_HUSB1.B8 P_USB.A8 P_USB.B8 S1.0 S1.3 U3.0

## Polygon pours and split planes (outlines as drawn)
GND on Bottom Layer "GND" (hatched Horizontal grid 8 track 8, remove dead copper, pour order 1): 0,0 2598.43,0 2598.43,2007.87 0,2007.87
GND on Top Layer "GND" (hatched Horizontal grid 8 track 8, remove dead copper, pour order 0): 0,0 0,2007.87 2598.43,2007.87 2598.43,0 2519.69,0

## Keep-outs
Keep-Out Layer:
  the board outline again, w10

## Other copper
Multi-Layer:
  pour cut-out: 233.7,0 1094,0 1102,8 1102,655 938,819 938,908 905,941 785,941 775,951 775,998 765,1008 668,1008 622,962 622,880 560,818 333,818 226,711 226,6.06

## Silkscreen, mask and mechanical layers (free items; w line width, h text height)
Top Overlay:
  drawing of 6 lines, arcs and shapes, not listed
  text "ON" at 446,1947 h35
  text "OFF" at 631,1947 h35
  text "沁恒微电子" at 1591.15,1202.92 h60
  text "BOOT0" at 2127,1197 h35
  text "http://wch.cn" at 1604.46,1153.84 h50
  text "BOOT1" at 2138.66,1097 h35
  text "3V3" at 2027.56,924.93 h35
  text "+5V" at 2202.28,924.93 h35
  text "GND" at 2027.56,825.2 h35
  text "GND" at 2202.28,825.2 h35
  text "SWDIO" at 1963.41,725.47 h35
  text "TX" at 2202.28,725.47 h35
  text "SWDCK" at 1957.58,625.74 h35
  text "RX" at 2202.28,625.74 h35
Bottom Overlay:
  text "CH32L&VxxCx_Touch_Kit-1v1" at 78,1398.73 h35 r90
  text "PB15" at 1350,706.65 h35 r90
  text "PB13" at 1450.05,706.65 h35 r90
  text "PB10" at 1550.09,706.65 h35 r90
  text "PC13" at 1950.28,706.65 h35 r90
  text "TS1" at 398.79,677.49 h35 r90
  text "TS3" at 499.06,677.49 h35 r90
  text "TS5" at 599.34,677.49 h35 r90
  text "TS7" at 699.62,677.49 h35 r90
  text "TS9" at 799.9,677.49 h35 r90
  text "PB9" at 1650.14,677.49 h35 r90
  text "PB5" at 1750.19,677.49 h35 r90
  text "PB3" at 1850.24,677.49 h35 r90
  text "3V3" at 2250.43,677.49 h35 r90
  text "NC" at 900.18,642.51 h35 r90
  text "NC" at 1000.46,642.51 h35 r90
  text "NC" at 2050.33,642.51 h35 r90
  text "NC" at 2150.38,642.51 h35 r90
  text "TS0" at 398.79,339.41 h35 r90
  text "TS2" at 499.06,339.41 h35 r90
  text "TS4" at 599.34,339.41 h35 r90
  text "TS6" at 699.62,339.41 h35 r90
  text "TS8" at 799.9,339.41 h35 r90
  text "NC" at 900.18,339.42 h35 r90
  text "NC" at 1000.46,339.42 h35 r90
  text "PA10" at 1350,339.41 h35 r90
  text "PB14" at 1450.05,339.41 h35 r90
  text "PB12" at 1550.09,339.41 h35 r90
  text "PB11" at 1650.14,339.42 h35 r90
  text "PB8" at 1750.19,339.41 h35 r90
  text "PB4" at 1850.24,339.41 h35 r90
  text "PA15" at 1950.28,339.41 h35 r90
  text "NC" at 2050.33,339.42 h35 r90
  text "NC" at 2150.38,339.42 h35 r90
  text "GND" at 2250.43,339.41 h35 r90
Mechanical 1:
  the board outline again, w10

## Text inside footprints (layer, text, board x,y; h text height)
D1: Top Overlay "+" at 768.4,1608.6 h40 r90